# Altium PCB WX0.003.577PCB-2.PcbDoc
Units mil, origin at the board's own origin, x right, y up, seen from the top; angles counter-clockwise.
Board outline 4734.44 x 7569.15 mil, 2 copper layers (Top Layer, Bottom Layer); 40 components, 53 nets, 113 pads, 163 vias.
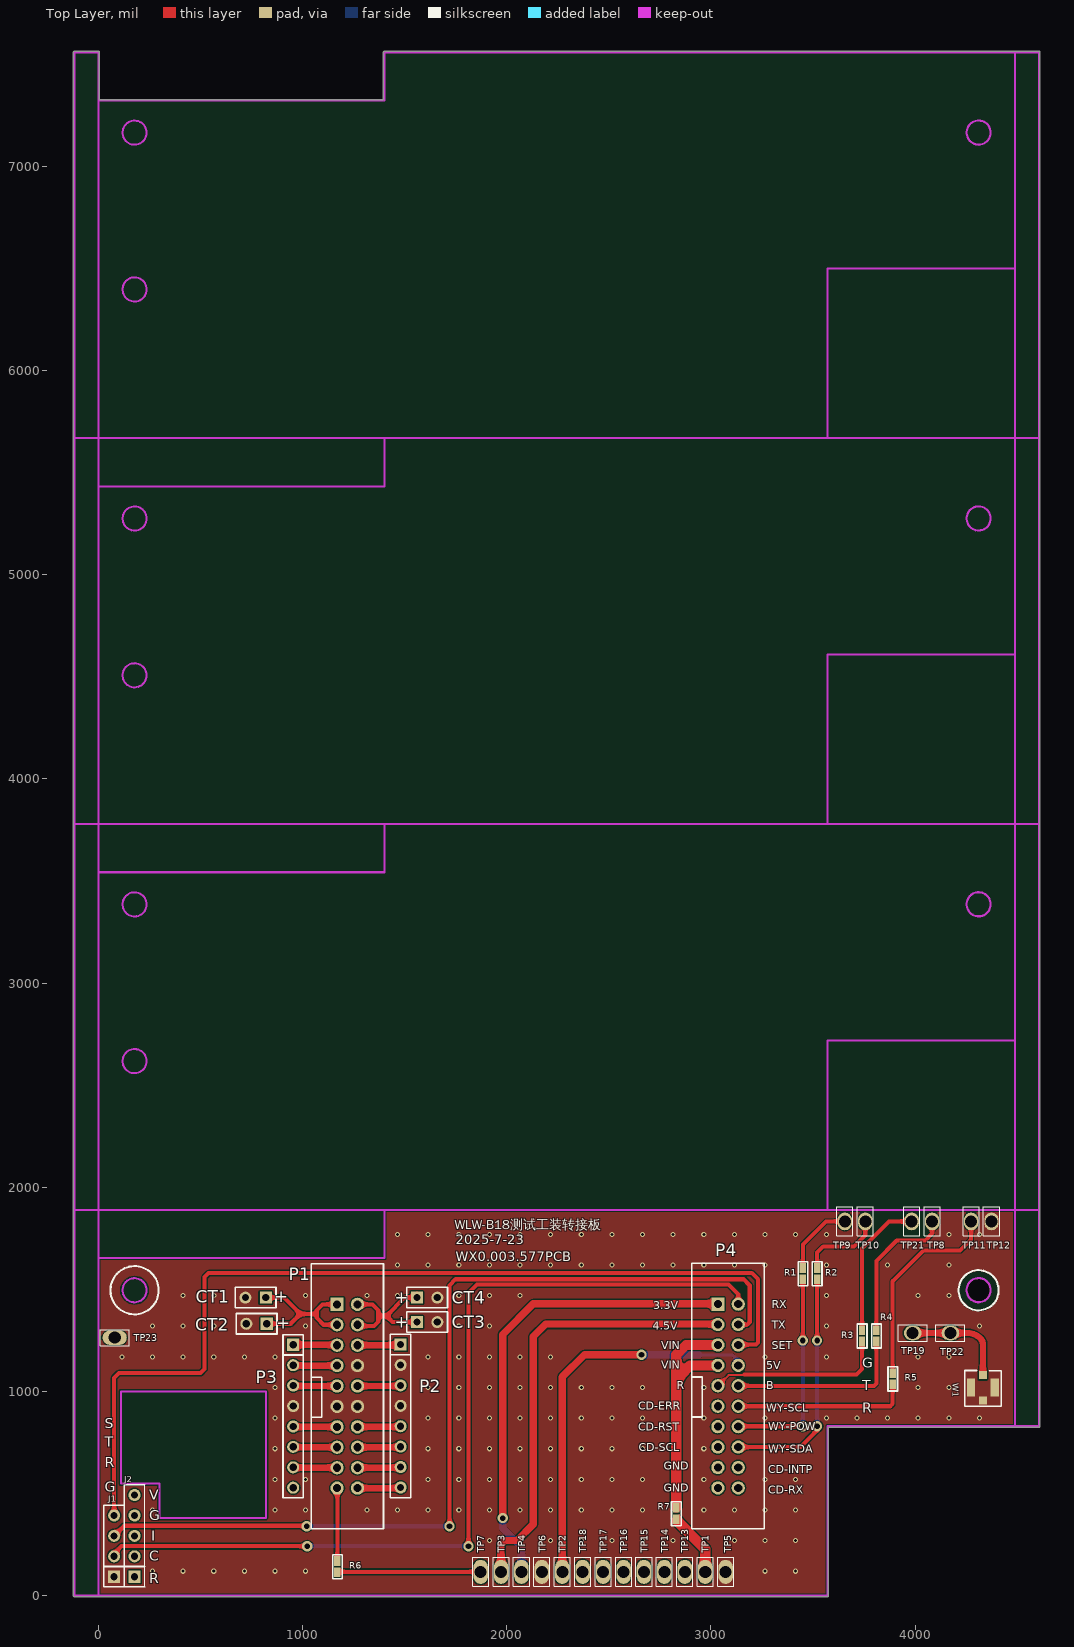
[diagram p0: Top Layer view]
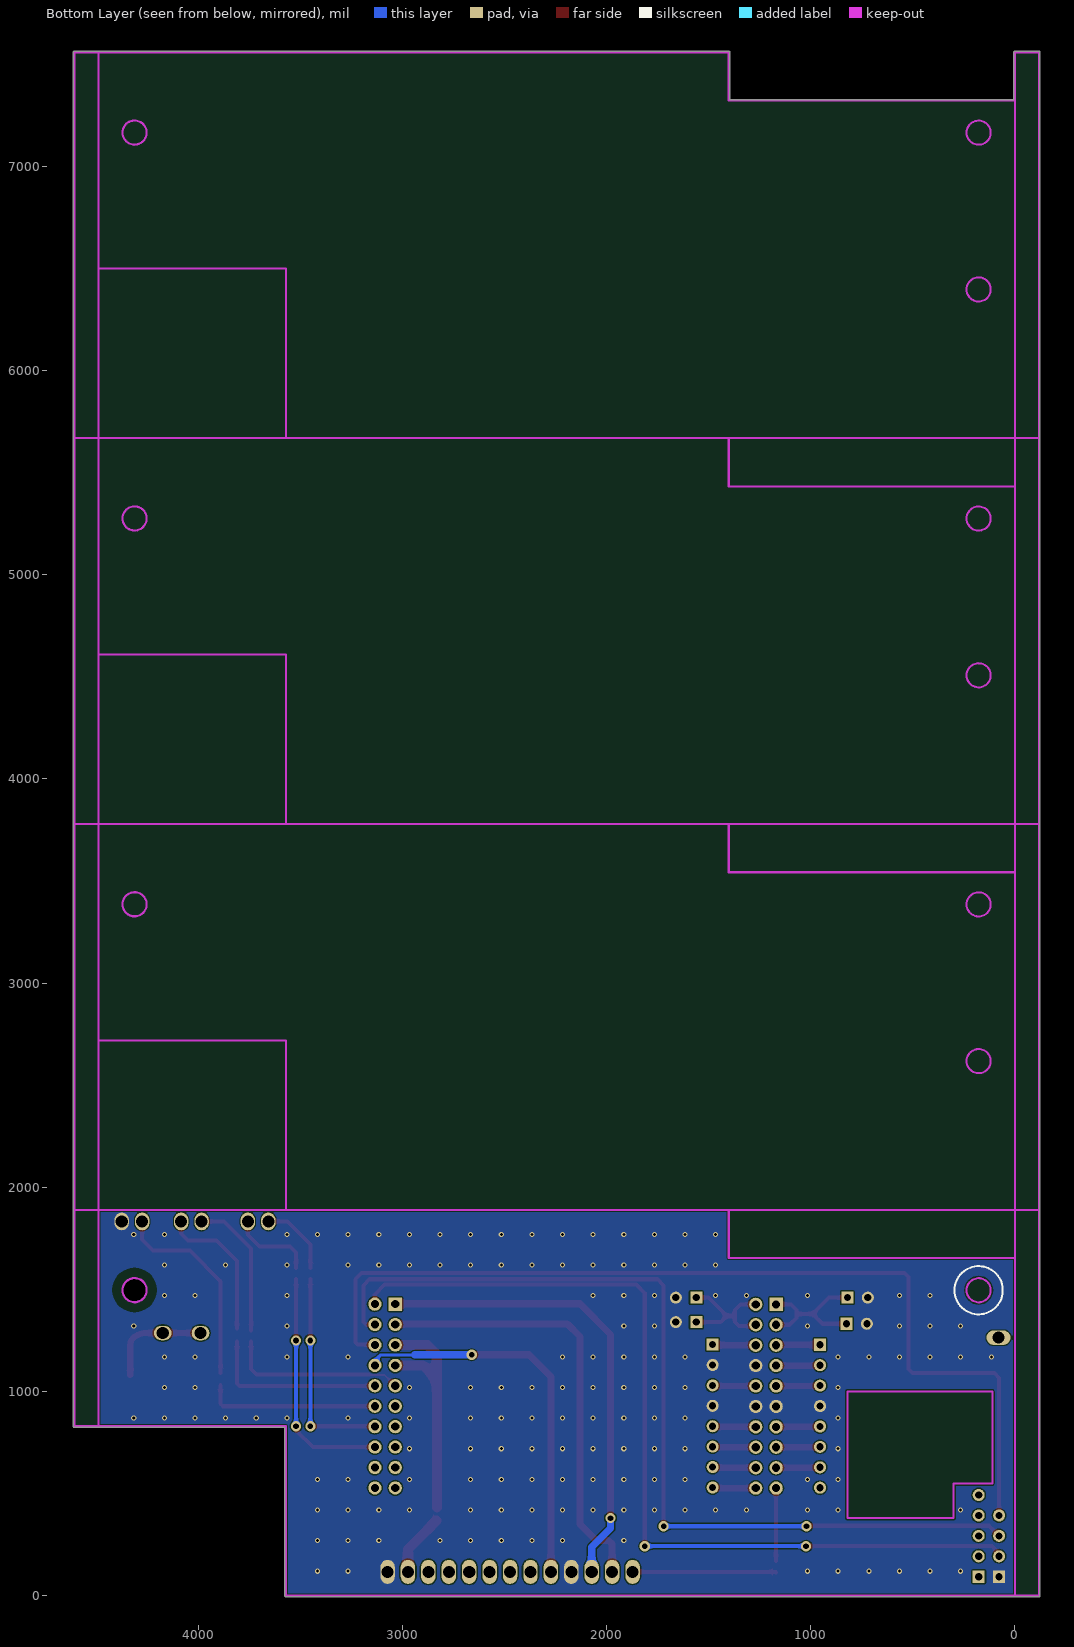
[diagram p1: Bottom Layer view, seen from below]

## Layer stack, top to bottom
Top Solder: solder mask 0.4, Solder Resist, Dk 3.5
Top Layer: signal copper 1.4
Dielectric 1: dielectric 12.6, FR-4, Dk 4.8
Bottom Layer: signal copper 1.4
Bottom Solder: solder mask 0.4, Solder Resist, Dk 3.5

## Board outline
-123.13,0 ccw(c-118.11,0) -118.11,-5.01 3570,-5.01 ccw(c3570,0) 3575.01,0 3575.01,824.98 4606.3,824.98 ccw(c4606.3,830) 4611.32,830 4611.32,7559.12 ccw(c4606.3,7559.12) 4606.3,7564.14 ccw(c4606.3,7559.12) 4606.3,7564.14 1401,7564.14 ccw(c1401,7559.12) 1395.99,7559.12 ccw(c1401,7559.12) 1395.99,7559.12 1395.99,7327.9 5.02,7327.9 5.02,7559.12 ccw(c0,7559.12) 0,7564.14 -118.11,7564.14 ccw(c-118.11,7559.12) -123.13,7559.12
cut-out: 4251.97,1496.05 ccw(c4311.03,1496.05) 4311.03,1436.99 ccw(c4311.03,1496.05) 4370.08,1496.05 ccw(c4311.03,1496.05) 4311.03,1555.1 ccw(c4311.03,1496.05)

## Design rules (kind name [scope] priority, off if disabled: settings)
Clearance [All] p1: gap=6 ignorepadtopadclearanceinfootprint=FALSE
ComponentClearance [All] p1: gap=0 collisioncheckmode=3 verticalgap=0 showdistances=FALSE
PlaneConnect [All] p1: planeconnectstyle=Direct reliefexpansion=20 reliefentries=4 reliefconductorwidth=10 reliefairgap=10
PolygonConnect [All] p1: connectstyle=Direct reliefconductorwidth=10 reliefentries=4 polygonreliefangle="90 Angle" airgapwidth=10
RoutingVias [All] p1: holewidth=28 width=50 viastyle="Through Hole" minholewidth=28 minwidth=50 maxholewidth=28 maxwidth=50
SilkToSilkClearance [All] p1: silktosilkclearance=0
SilkToSolderMaskClearance [IsPad] p1: minsilkscreentomaskgap=0 clearancetoexposedcopper=TRUE
SolderMaskExpansion [All] p1: expansion=4
Width [All] p1: maxlimit=50 minlimit=10 preferedwidth=10
26 further rules are at their usual default settings.

## Components (designator, comment, footprint, x,y, rotation, side; value= is the part's Value field where it differs from the comment)
CT1 "BAT" BAT2 769.53,1460.06 r180 top
CT2 "BAT" BAT2 774,1332 r180 top
CT3 "BAT" BAT2 1610.47,1339.94 r0 top (schematic designator CT1)
CT4 "BAT" BAT2 1610.47,1459.94 r0 top (schematic designator CT1)
J1 "PIN254_1*4*WXHJ" PIN254_1*4*WXHJ 77,93 r90 top
J2 "PIN254_1*5*WXHJ" PIN254_1*5*WXHJ 177,93 r90 top
P1 "" PHD254_2X10P 1219,977 r0 top
P2 "Header 8" HDR1X8 1480,1230 r270 top
P3 "Header 8" HDR1X8 954,1229 r270 top
P4 "" PHD254_2X10P 3084,978 r0 top
R1 "22" R0603LLL 3450,1544.1 r90 top
R2 "22" R0603LLL 3520,1544.1 r90 top (schematic designator R1)
R3 "22" R0603LLL 3740,1238.9 r90 top (schematic designator R1)
R4 "22" R0603LLL 3810,1238.9 r90 top (schematic designator R1)
R5 "22" R0603LLL 3890,1028.9 r90 top (schematic designator R1)
R6 "22" R0603LLL 1170,108.9 r90 top (schematic designator R1)
R7 "22" R0603LLL 2830,368.9 r90 top (schematic designator R1)
TP1 "Test Point" TP5#1 2972,117 r0 top
TP2 "Test Point" TP5#1 2272,117 r0 top
TP3 "Test Point" TP5#1 1972,117 r0 top
TP4 "Test Point" TP5#1 2072,117 r0 top
TP5 "Test Point" TP5#1 3072,117 r0 top (schematic designator TP17)
TP6 "Test Point" TP5#1 2172,117 r180 top (schematic designator TP24)
TP7 "Test Point" TP5#1 1872,117 r0 top
TP8 "Test Point" TP5#2 4083,1833 r180 top
TP9 "Test Point" TP5#2 3656,1833 r180 top
TP10 "Test Point" TP5#2 3756,1833 r0 top
TP11 "Test Point" TP5#2 4274,1833 r0 top
TP12 "Test Point" TP5#2 4374,1833 r180 top (schematic designator TP23)
TP13 "Test Point" TP5#1 2872,117 r180 top
TP14 "Test Point" TP5#1 2772,117 r180 top
TP15 "Test Point" TP5#1 2672,117 r180 top
TP16 "Test Point" TP5#1 2572,117 r180 top
TP17 "Test Point" TP5#1 2472,117 r0 top (schematic designator TP6)
TP18 "Test Point" TP5#1 2372,117 r180 top
TP19 "Test Point" TP5#2 3988,1286.51 r90 top (schematic designator TP10)
TP21 "Test Point" TP5#2 3983,1833 r0 top
TP22 "Test Point" TP5#2 4173,1286.51 r270 top (schematic designator TP10)
TP23 "Test Point" TP5#1 80,1264 r270 top (schematic designator TP7)
W1 "天线" ANT-IPEX_1 4331.93,1081.02 r270 top

## Footprints (in the part's own frame and the unit in brackets; to place one, negate y for a bottom-side part, rotate by r counter-clockwise, add the part's x,y. Pads: shape width x height; smd on the part's side, far side on the other; paste and mask are expansions set on the pad)
ANT-IPEX_1 [mm]
  rect 1.05x1 smd: 1(0,0)
  rect 2.2x1 smd: 2(1.55,1.475) 2(1.55,-1.475)
  rect 1x1 smd: 2(3.151,0)
  silkscreen extent -0.56,-2.26 3.9,2.26
BAT2 [mm]
  rect 1.5x1.5 hole 0.9: 1(-1.282,0.001)
  round 1.5 hole 0.9: 2(1.258,0.001)
  silkscreen extent -2.55,-1.27 2.53,1.27
HDR1X8 [mm] "Connector; Header; 8 Position"
  rect 1.5x1.5 hole 0.9: 1(0,0)
  round 1.5 hole 0.9: 2(2.54,0) 3(5.08,0) 4(7.62,0) 5(10.16,0) 6(12.7,0) 7(15.24,0) 8(17.78,0)
  silkscreen extent -1.27,-1.27 19.05,1.27, body extent -1.27,-1.27 19.05,1.27, height 8.54
PHD254_2X10P [mil]
  rect 65x65 hole 40: 1(-50,450)
  round 65 hole 40: 2(50,450) 3(-50,350) 4(50,350) 5(-50,250) 6(50,250) 7(-50,150) 8(50,150) 9(-50,50) 10(50,50) 11(-50,-50) 12(50,-50) 13(-50,-150) 14(50,-150) 15(-50,-250) 16(50,-250) 17(-50,-350) 18(50,-350) 19(-50,-450) 20(50,-450)
  silkscreen extent -177,-650 177,650
PIN254_1*4*WXHJ [mm] "Connector; Header; 4 Position"
  rect 1.5x1.5 hole 0.9: 1(0,0)
  round 1.5 hole 0.9: 2(2.54,0) 3(5.08,0) 4(7.62,0)
  silkscreen extent -1.27,-1.27 8.89,1.27, body extent -1.3,-1.3 8.86,1.24, height 8.54
PIN254_1*5*WXHJ [mm]
  rect 1.5x1.5 hole 0.9: 1(0,0)
  round 1.5 hole 0.9: 2(2.54,0) 3(5.08,0) 4(7.62,0) 5(10.16,0)
  silkscreen extent -1.27,-1.27 11.43,1.27
R0603LLL [mil]
  rect 47.24x31 smd: 1(5.9,0) 2(61.1,0)
  silkscreen extent -26,-24 92,23
TP5#1 [mm]
  oval 1.8x3 hole 1.5: 1(0,0)
  silkscreen extent -1,-1.8 1,1.8
TP5#2 [mm]
  oval 1.8x2.2 hole 1.5: 1(0,0)
  silkscreen extent -1,-1.8 1,1.8

## Part data
CT1 CT2 CT3 CT4: "电池"
J1: library part AD_WXHJ_PinHeader_01, "1*4 ，Φ1.0 ，2.54mm，直脚,无需焊接器件"
J2: library part AD_WXHJ_PinHeader_02, "1*5 ，Φ1.0 ，2.54mm，直脚,无需焊接器件"
P1 P4: library part "Header 10X2  PASS", "Header, 10-Pin, Dual row"
P2 P3: "Header, 8-Pin"
R1 R2 R3 R4 R5 R6 R7: library part RES2
TP1 TP2 TP3 TP4 TP5 TP6 TP7 TP13 TP14 TP15 TP16 TP17 TP18 TP23: library part "Test Point  PASS", "测试点"
TP8 TP9 TP10 TP11 TP12 TP19 TP21 TP22: "测试点"
W1: library part 1010902-0145, "UB06000058A,3*3.1*1.25mm,公头,单排,IPEX一代板端"

## Via types
v1: diameter 25, hole 15, Top Layer to Bottom Layer, tented both sides, 153 vias
v2: diameter 50, hole 28, Top Layer to Bottom Layer, tented both sides, 10 vias

## Nets (pads, with @x,y where several pads share a name; then routed paths per layer and width w, separated by ;. In a path a pad name is that pad's centre, name@x,y a point inside that pad or via, vN(x,y) a via of type N, cw(c..) or ccw(c..) an arc to the next point about the centre after c; other vN are vias at no path point)
3.3V: P4.1 TP4.1 | length 2318.1
  Top Layer w35: v2(1980,380) 1980,1280 2130,1430 3032,1430 P4.1
  Bottom Layer w35: v2(1980,380) 1980,330 2072,238 TP4.1
3.6V: P4.3 TP3.1 | length 2183.3
  Top Layer w35: TP3.1 1972,252 1990,270 2050,270 2130,350 2130,1270 2190,1330 3032,1330 P4.3
5V: P4.8 TP2.1 | length 1897.3
  Top Layer w35: TP2.1 2272,1072 2380,1180 v2(2660,1180)
  Bottom Layer w15: 2940,1180 2942,1178 3108,1178 3134,1152 P4.8
  Bottom Layer w35: v2(2660,1180) 2940,1180
119: TP23.1
GND: CT1.2 CT2.2 CT3.2 CT4.2 J1.1 P1.8 P1.11 P1.12 P2.2 P2.4 P3.4 TP5.1 TP6.1 TP12.1 W1.2
  other v1: 265,120 415,120 565,120 715,120 865,120 1015,120 3265,120 3415,120 1915,270 2215,270 2365,270 2515,270 2665,270 2815,270 3115,270 3265,270 3415,270 265,420 865,420 1015,420 1315,420 1465,420 1615,420 1765,420 1915,420 2065,420 2215,420 2365,420 2515,420 2665,420 2965,420 3115,420 3265,420 3415,420 865,570 1015,570 1615,570 1765,570 1915,570 2065,570 2215,570 2365,570 2515,570 2665,570 2965,570 3265,570 3415,570 865,720 1615,720 1765,720 1915,720 2065,720 2215,720 2365,720 2515,720 2665,720 2965,720 865,870 1615,870 1765,870 1915,870 2065,870 2215,870 2365,870 2515,870 2665,870 2965,870 3265,870 3565,870 3715,870 3865,870 4015,870 4165,870 4315,870 865,1020 1615,1020 1765,1020 1915,1020 2065,1020 2215,1020 2365,1020 2515,1020 2665,1020 2965,1020 4015,1020 4165,1020 115,1170 265,1170 415,1170 565,1170 715,1170 865,1170 1615,1170 1765,1170 1915,1170 2065,1170 2215,1170 3265,1170 3565,1170 4015,1170 4165,1170 265,1320 415,1320 565,1320 1015,1320 1765,1320 1915,1320 3565,1320 4315,1320 415,1470 565,1470 1015,1470 1315,1470 1465,1470 1765,1470 1915,1470 2065,1470 3565,1470 4015,1470 4165,1470 1465,1620 1615,1620 1765,1620 1915,1620 2065,1620 2215,1620 2365,1620 2515,1620 2665,1620 2815,1620 2965,1620 3115,1620 3265,1620 3565,1620 3865,1620 4165,1620 1465,1770 1615,1770 1765,1770 1915,1770 2065,1770 2215,1770 2365,1770 2515,1770 2665,1770 2815,1770 2965,1770 3115,1770 3265,1770 3415,1770 3565,1770 4165,1770 4315,1770
GND1: 
GND2: 
GND3: 
GND4: 
HALL1_INTP6: 
HALL1_PWR: CT1.1 CT2.1 P1.1 P1.3 | length 731.4
  Top Layer w20: CT1.1 910,1460 990,1380 ; CT2.1 941.95,1331.95 990,1380 ; P1.3 1103,1327 1070,1360 1070,1380 ; P1.1 1097,1427 1070,1400 1070,1380 ; 990,1380 1070,1380
HALL2_INTP7: 
HALL2_PWR: CT3.1 CT4.1 P1.2 P1.4 | length 675.2
  Top Layer w20: P1.4 1276,1320 1350,1320 1370,1340 1370,1370 ; P1.2 1343,1427 1370,1400 1370,1370 ; CT4.1@1559.2,1479.2 CT4.1@1560,1480 ; CT3.1 1440,1340 1410,1370 ; CT4.1 1500,1460 1410,1370 ; 1370,1370 1410,1370
HALL3_INTP8: 
HALL3_PWR: 
IRDA_RXD1: J1.2 P4.2 | length 4410.8
  Top Layer w20: J1.2 77,207 112.53,242.53 v2(1022.53,242.53) ; v2(1812.53,242.53) 1812.53,1482.53 1854,1524 3086,1524 3134,1476 P4.2
  Bottom Layer w20: v2(1022.53,242.53) v2(1812.53,242.53)
IRDA_TXD1: J1.3 P4.4 | length 4580.4
  Top Layer w20: J1.3 126.53,342.53 1017.47,342.53 v2(1020,340) ; v2(1720,340) 1720,1520 1750,1550 3160,1550 3190,1520 3190,1340 3178,1328 P4.4
  Bottom Layer w20: v2(1020,340) v2(1720,340)
MOTO_B: R4.2 TP8.1 | length 718.1
  Top Layer w20: R4.2@3810,1310 3810,1640 3910,1740 4050,1740 4083,1773 TP8.1
MOTO_B_1: P4.10 R4.1 | length 885.8
  Top Layer w20: P4.10 3798,1028 3810,1040 R4.1
MOTO_R: R3.2 TP21.1 | length 698.1
  Top Layer w20: R3.2 3740,1700 3873,1833 TP21.1
MOTO_R_1: P4.9 R3.1 | length 874.8
  Top Layer w10: P4.9 3086.5,1080.5 3160.75,1080.5 3163.77,1083.53
  Top Layer w20: 3163.77,1083.53 3713.53,1083.53 3740,1110 R3.1
NB_DBG_RXD: 
NB_DBG_TXD: 
NetD4_1: R6.1 TP7.1 | length 702.9
  Top Layer w20: R6.1 1172.19,117 TP7.1
NetD4_11: P1.19 R6.2 | length 357.4
  Top Layer w20: P1.19 1170,526 R6.2
NetJ2_1: 
NetP1_5: P1.5 P3.1 | length 213
  Top Layer w31.5: P3.1 P1.5@1167,1229
NetP1_6: P1.6 P2.1 | length 208
  Top Layer w31.5: P1.6 P2.1@1477,1227
NetP1_7: P1.7 P3.2 | length 213
  Top Layer w31.5: P3.2@956,1127 P1.7
NetP1_9: P1.9 P3.3 | length 213
  Top Layer w31.5: P3.3@956,1027 P1.9
NetP1_10: P1.10 P2.3 | length 208
  Top Layer w31.5: P1.10 P2.3@1477,1027
NetP1_13: P1.13 P3.5 | length 213
  Top Layer w31.5: P3.5@956,827 P1.13
NetP1_14: P1.14 P2.5 | length 208
  Top Layer w31.5: P1.14 P2.5@1477,827
NetP1_15: P1.15 P3.6 | length 213
  Top Layer w31.5: P3.6@956,727 P1.15
NetP1_16: P1.16 P2.6 | length 208
  Top Layer w31.5: P1.16 P2.6@1477,727
NetP1_17: P1.17 P3.7 | length 213
  Top Layer w31.5: P3.7@956,627 P1.17
NetP1_18: P1.18 P2.7 | length 208
  Top Layer w31.5: P1.18 P2.7@1477,627
NetP1_20: P1.20 P2.8 | length 208
  Top Layer w31.5: P1.20 P2.8@1477,527
SET: J1.4 P4.6 | length 4726.5
  Top Layer w20: J1.4 77,1067 100,1090 500,1090 520,1110 520,1560 540,1580 3200,1580 3230,1550 3230,1240 3220,1230 3136,1230 P4.6
SWCLK: 
SWIO: 
tianxian: TP19.1 TP22.1 W1.1 | length 521.3
  Top Layer w30: TP19.1 4256,1286.51 cw(c4256,1196) 4320,1260 cw(c4291.2,1231.2) 4331.93,1231.2 W1.1
VCC: 
VIN: R7.1 TP1.1 | length 308.3
  Top Layer w50: R7.1@2832.5,367.5 2972,228 TP1.1
VIN1: P4.5 P4.7 R7.2 | length 1202.6
  Top Layer w50: R7.2@2830,433.43 2830,1060 ; P4.7 2898,1128 2830,1060 ; P4.5 2878,1228 2830,1180 2830,1060
WY_POW: R1.2 TP9.1 | length 367.6
  Top Layer w19.68: R1.2 3450,1720 3563,1833 TP9.1
WY_POW_1: P4.14 R1.1 | length 1036.8
  Top Layer w19.68: P4.14 3136,830 v2(3450,830) ; v2(3450,1250) R1.1
  Bottom Layer w19.68: v2(3450,830) v2(3450,1250)
WY_SCL: R5.2 TP11.1 | length 1007.5
  Top Layer w20: R5.2 3890,1540 4040,1690 4220,1690 4274,1744 TP11.1
WY_SCL_1: P4.12 R5.1 | length 854.5
  Top Layer w20: P4.12 3878,928 3890,940 R5.1@3890,1030.71
  Bottom Layer w20: P4.12 P4.12@3136,930
WY_SDA: R2.2 TP10.1 | length 435.8
  Top Layer w19.68: R2.2 3520,1680 3550,1710 3700,1710 3756,1766 TP10.1 TP10.1@3778.38,1833
WY_SDA_1: P4.16 R2.1 | length 1160
  Top Layer w19.68: P4.16 3438,728 3520,810 v2(3520,830) ; v2(3520,1250) R2.1
  Bottom Layer w19.68: v2(3520,830) v2(3520,1250)
XS_R: 
XS_T: 
pads on no net: J2.1 J2.2 J2.3 J2.4 J2.5 P3.8 P4.11 P4.13 P4.15 P4.17 P4.18 P4.19 P4.20 TP13.1 TP14.1 TP15.1 TP16.1 TP17.1 TP18.1

## Polygon pours and split planes (outlines as drawn)
GND on Top Layer "Top Layer-No Net" (solid, remove dead copper, pour order 10): -123.13,0 ccw(c-118.11,0) -118.11,-5.01 3570,-5.01 ccw(c3570,0) 3575.01,0 3575.01,824.98 4606.3,824.98 ccw(c4606.3,830) 4611.32,830 4611.32,7559.12 ccw(c4606.3,7559.12) 4606.3,7564.14 ccw(c4606.3,7558.95) 4606.3,7564.14 1401,7564.14 ccw(c1401,7559.12) 1395.99,7559.12 ccw(c1400.8,7559.12) 1395.99,7559.12 1395.99,7327.9 5.02,7327.9 5.02,7559.12 ccw(c0,7559.12) 0,7564.14 -118.11,7564.14 ccw(c-118.11,7559.12) -123.13,7559.12
GND on Bottom Layer "Top Layer-No Net1" (solid, remove dead copper, pour order 11): -123.13,0 ccw(c-118.11,0) -118.11,-5.01 3570,-5.01 ccw(c3570,0) 3575.01,0 3575.01,824.98 4606.3,824.98 ccw(c4606.3,830) 4611.32,830 4611.32,7559.12 ccw(c4606.3,7559.12) 4606.3,7564.14 ccw(c4606.3,7558.95) 4606.3,7564.14 1401,7564.14 ccw(c1401,7559.12) 1395.99,7559.12 ccw(c1400.8,7559.12) 1395.99,7559.12 1395.99,7327.9 5.02,7327.9 5.02,7559.12 ccw(c0,7559.12) 0,7564.14 -118.11,7564.14 ccw(c-118.11,7559.12) -123.13,7559.12

## Keep-outs
Keep-Out Layer:
  circle w10: c177.17,1496.08 r59.06
  circle w10: c4311.03,1496.05 r59.06
  circle w10: c4311.03,1497.05 r59.06
  circle w10: c4311.03,1496.05 r59.06
  circle w10: c4311.03,1496.05 r59.06
  circle w10: c4311.03,1496.05 r59.06
  circle w10: c4311.03,1496.05 r59.06
  circle w10: c4311.03,1496.05 r59.06
  circle w10: c4311.03,1496.05 r59.06
  circle w10: c4311.03,1496.05 r59.06
  circle w10: c4311.03,1496.05 r59.06
  circle w10: c4311.03,3385.83 r59.06
  circle w10: c4311.03,3385.83 r59.06
  circle w10: c4311.03,3385.83 r59.06
  circle w10: c4311.03,3385.83 r59.06
  circle w10: c4311.03,3385.83 r59.06
  circle w10: c4311.03,3385.83 r59.06
  circle w10: c4311.03,3385.83 r59.06
  circle w10: c4311.03,3385.83 r59.06
  circle w10: c4311.03,3386.83 r59.06
  circle w10: c4311.03,3385.83 r59.06
  circle w10: c177.17,2618.14 r59.06
  circle w10: c177.17,3385.86 r59.06
  circle w10: c4311.03,5275.61 r59.06
  circle w10: c4311.03,5275.61 r59.06
  circle w10: c4311.03,5275.61 r59.06
  circle w10: c4311.03,5275.61 r59.06
  circle w10: c4311.03,5275.61 r59.06
  circle w10: c4311.03,5275.61 r59.06
  circle w10: c4311.03,5275.61 r59.06
  circle w10: c4311.03,5275.61 r59.06
  circle w10: c4311.03,5276.61 r59.06
  circle w10: c4311.03,5275.61 r59.06
  circle w10: c177.17,4507.92 r59.06
  circle w10: c177.17,5275.64 r59.06
  circle w10: c4311.03,7165.39 r59.06
  circle w10: c4311.03,7165.39 r59.06
  circle w10: c4311.03,7165.39 r59.06
  circle w10: c4311.03,7165.39 r59.06
  circle w10: c4311.03,7165.39 r59.06
  circle w10: c4311.03,7165.39 r59.06
  circle w10: c4311.03,7165.39 r59.06
  circle w10: c4311.03,7165.39 r59.06
  circle w10: c4311.03,7166.39 r59.06
  circle w10: c4311.03,7165.39 r59.06
  circle w10: c177.17,6397.7 r59.06
  circle w10: c177.17,7165.42 r59.06
  lines w10: 4488.19,2719.78 3570,2719.78 3570,2320.78 3570,2043.78 3570,1889.78 0,1889.78 ; -118.11,1889.78 0,1889.78 ; -118.11,1889.78 -118.11,0 0,0 ; -118.11,1889.78 -118.11,3779.56 ; -118.11,3779.56 0,3779.56 ; -118.11,3779.56 -118.11,5669.34 ; -118.11,5669.34 0,5669.34 ; -118.11,5669.34 -118.11,7559.12 0,7559.12 0,7322.89 ; 0,0 3570,0 3570,154 3570,431 3570,830 4488.19,830 ; 0,0 0,1653.54 ; 0,1653.54 1401,1653.54 1401,1889.78 ; 0,1653.54 0,1889.78 ; 0,1889.78 1401,1889.78 ; 0,1889.78 0,3543.32 ; 0,3543.32 0,3779.56 ; 0,3543.32 1401,3543.32 1401,3779.56 ; 0,3779.56 1401,3779.56 ; 0,3779.56 0,5433.1 ; 0,3779.56 3570,3779.56 3570,3933.56 3570,4210.56 3570,4609.56 4488.19,4609.56 ; 0,5433.1 0,5669.34 ; 0,5433.1 1401,5433.1 1401,5669.34 ; 0,5669.34 1401,5669.34 ; 0,5669.34 0,7322.89 ; 0,5669.34 3570,5669.34 3570,5823.34 3570,6100.34 3570,6499.34 4488.19,6499.34 ; 0,7322.89 1401,7322.89 1401,7559.12 4488.19,7559.12 ; 1401,1889.78 4488.19,1889.78 ; 1401,3779.56 4488.19,3779.56 ; 1401,5669.34 4488.19,5669.34 ; 4488.19,830 4488.19,1889.78 ; 4488.19,830 4606.3,830 4606.3,1889.78 ; 4488.19,1889.78 4488.19,3779.56 ; 4488.19,1889.78 4606.3,1889.78 ; 4488.19,3779.56 4606.3,3779.56 ; 4488.19,3779.56 4488.19,4609.56 ; 4488.19,4609.56 4488.19,5669.34 ; 4488.19,4609.56 4488.19,4609.56 ; 4488.19,5669.34 4606.3,5669.34 ; 4488.19,5669.34 4488.19,6499.34 ; 4488.19,6499.34 4488.19,7559.12 ; 4488.19,7559.12 4606.3,7559.12 ; 4488.19,7559.12 4606.3,7559.12 ; 4606.3,1889.78 4606.3,3779.56 ; 4606.3,3779.56 4606.3,5669.34 ; 4606.3,5669.34 4606.3,7559.12 ; 110,550 110,1000 820,1000 820,380 300,380 300,550 110,550

## Other copper
Top Layer:
  pour cut-out: 4212.39,1490.43 ccw(c4310.81,1490.43) 4310.81,1392 ccw(c4310.81,1490.43) 4409.24,1490.43 ccw(c4310.81,1490.43) 4310.81,1588.85 ccw(c4310.81,1490.43)
Bottom Layer:
  pour cut-out: 4203.06,1497.31 ccw(c4311.33,1497.31) 4311.33,1389.05 ccw(c4311.33,1497.31) 4419.59,1497.31 ccw(c4311.33,1497.31) 4311.33,1605.58 ccw(c4311.33,1497.31)

## Silkscreen, mask and mechanical layers (free items; w line width, h text height)
Top Overlay:
  circle w10: c177.17,1496.08 r118.11
  circle w10: c4311.03,1496.05 r98.43
  lines w5: 227,543 227,45 229,43
  text "WLW-B18测试工装转接板" at 1745.95,1777 h78.74
  text "2025-7-23" at 1750,1703 h78.74
  text "WX0.003.577PCB" at 1751,1621 h78.74
  text "RX" at 3297,1408 h39.37
  text "3.3V" at 2717,1404 h39.37
  text "TX" at 3299,1308 h39.37
  text "4.5V" at 2716,1302 h39.37
  text "SET" at 3299,1207 h39.37
  text "VIN" at 2757,1206 h39.37
  text "G" at 3740,1116 h50
  text "VIN" at 2757,1111 h39.37
  text "5V" at 3270,1110 h39.37
  text "R" at 2833,1010 h39.37
  text "B" at 3270,1010 h39.37
  text "T" at 3740,1006 h50
  text "CD-ERR" at 2643,911 h39.37
  text "WY-SCL" at 3270,900 h39.37
  text "R" at 3740,896 h50
  text "S" at 30,820 h50
  text "WY-POW" at 3280,810 h39.37
  text "CD-RST" at 2643,809 h39.37
  text "T" at 30,730 h50
  text "CD-SCL" at 2646,708 h39.37
  text "WY-SDA" at 3280,700 h39.37
  text "R" at 30,630 h50
  text "GND" at 2768,617 h39.37
  text "CD-INTP" at 3280,600 h39.37
  text "G" at 30,510 h50
  text "GND" at 2768,508 h39.37
  text "CD-RX" at 3280,500 h39.37
  text "V" at 250,470 h50
  text "G" at 250,370 h50
  text "I" at 260,270 h50
  text "C" at 250,170 h50
  text "R" at 250,60 h50
Bottom Overlay:
  circle w10: c177.17,1496.08 r118.11

## Text inside footprints (layer, text, board x,y; h text height)
CT1: Top Overlay "+" at 929.53,1488.06 h59.06 r180
CT2: Top Overlay "+" at 939,1359 h59.06 r180
CT3: Top Overlay "+" at 1450.47,1311.94 h59.06
CT4: Top Overlay "+" at 1450.47,1431.94 h59.06